# Altium PCB SwitchMultiControl.PcbDoc
Units mm, origin at the board's own origin, x right, y up, seen from the top; angles counter-clockwise.
Board outline 65 x 96 mm, 2 copper layers (Top Layer, Bottom Layer); 37 components, 23 nets, 109 pads, 0 vias.
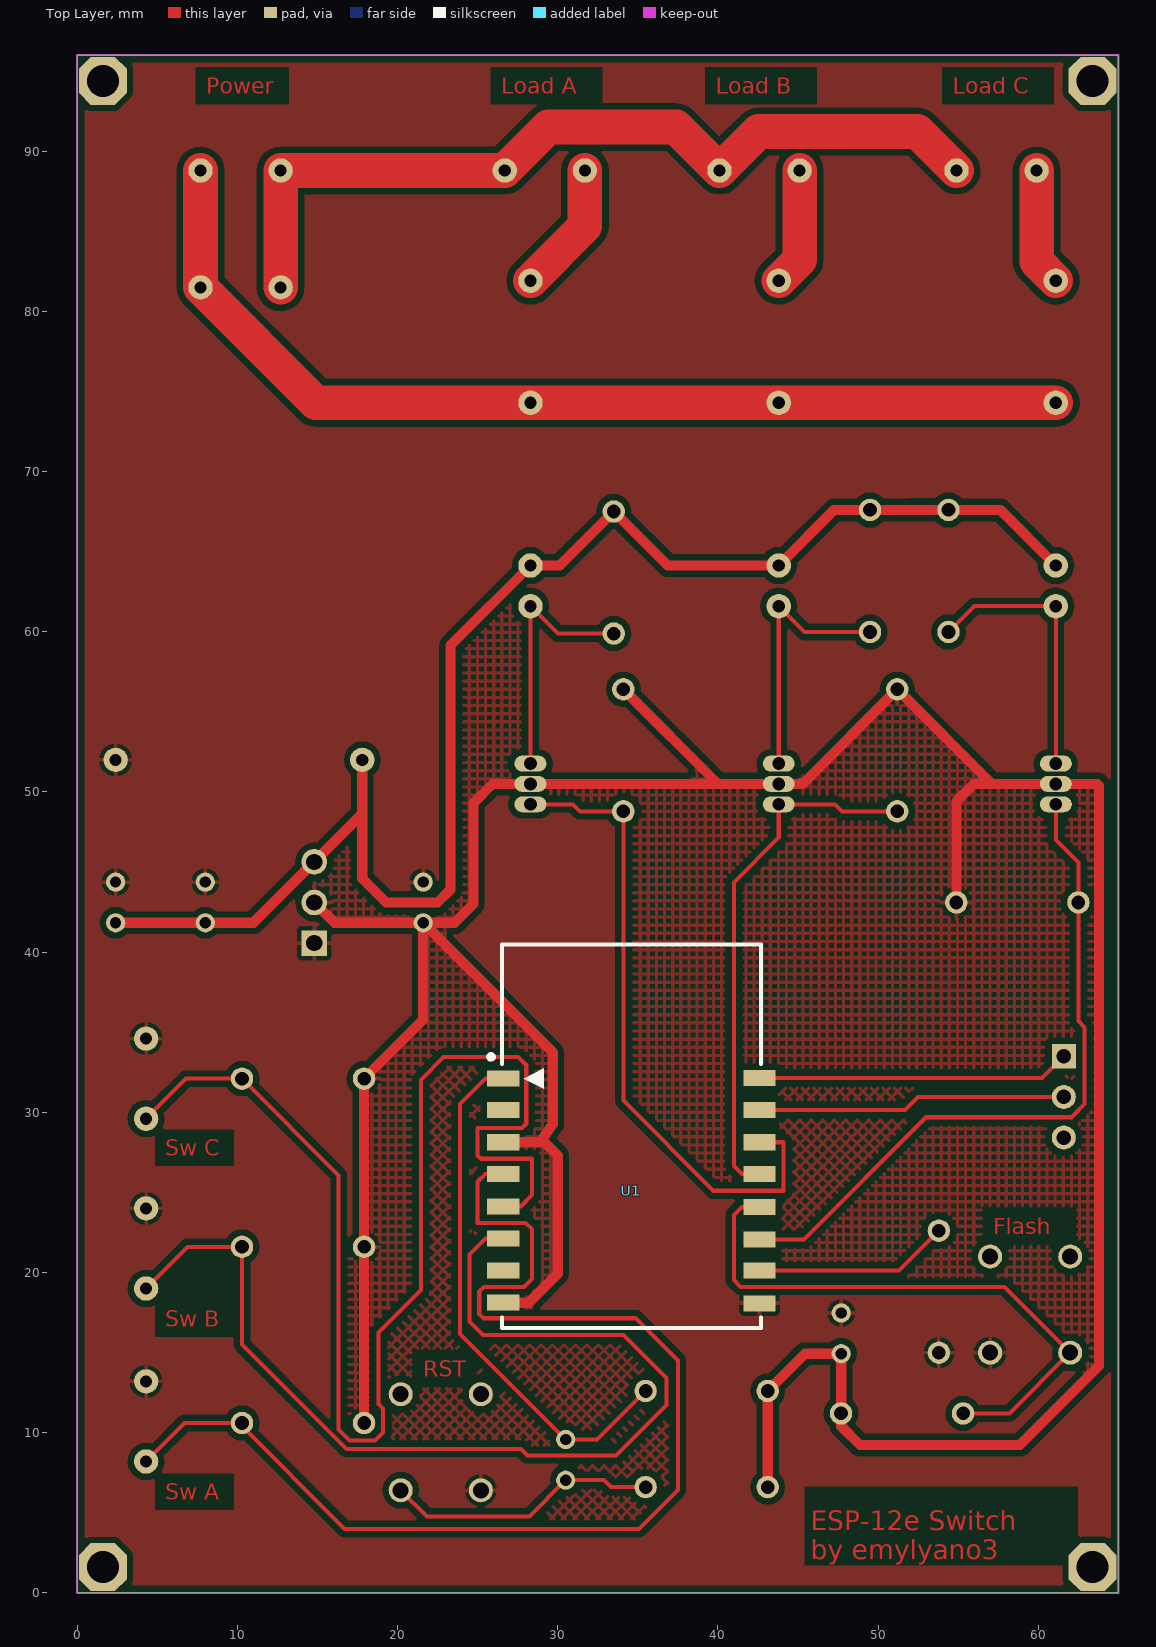
[diagram p0: Top Layer view]
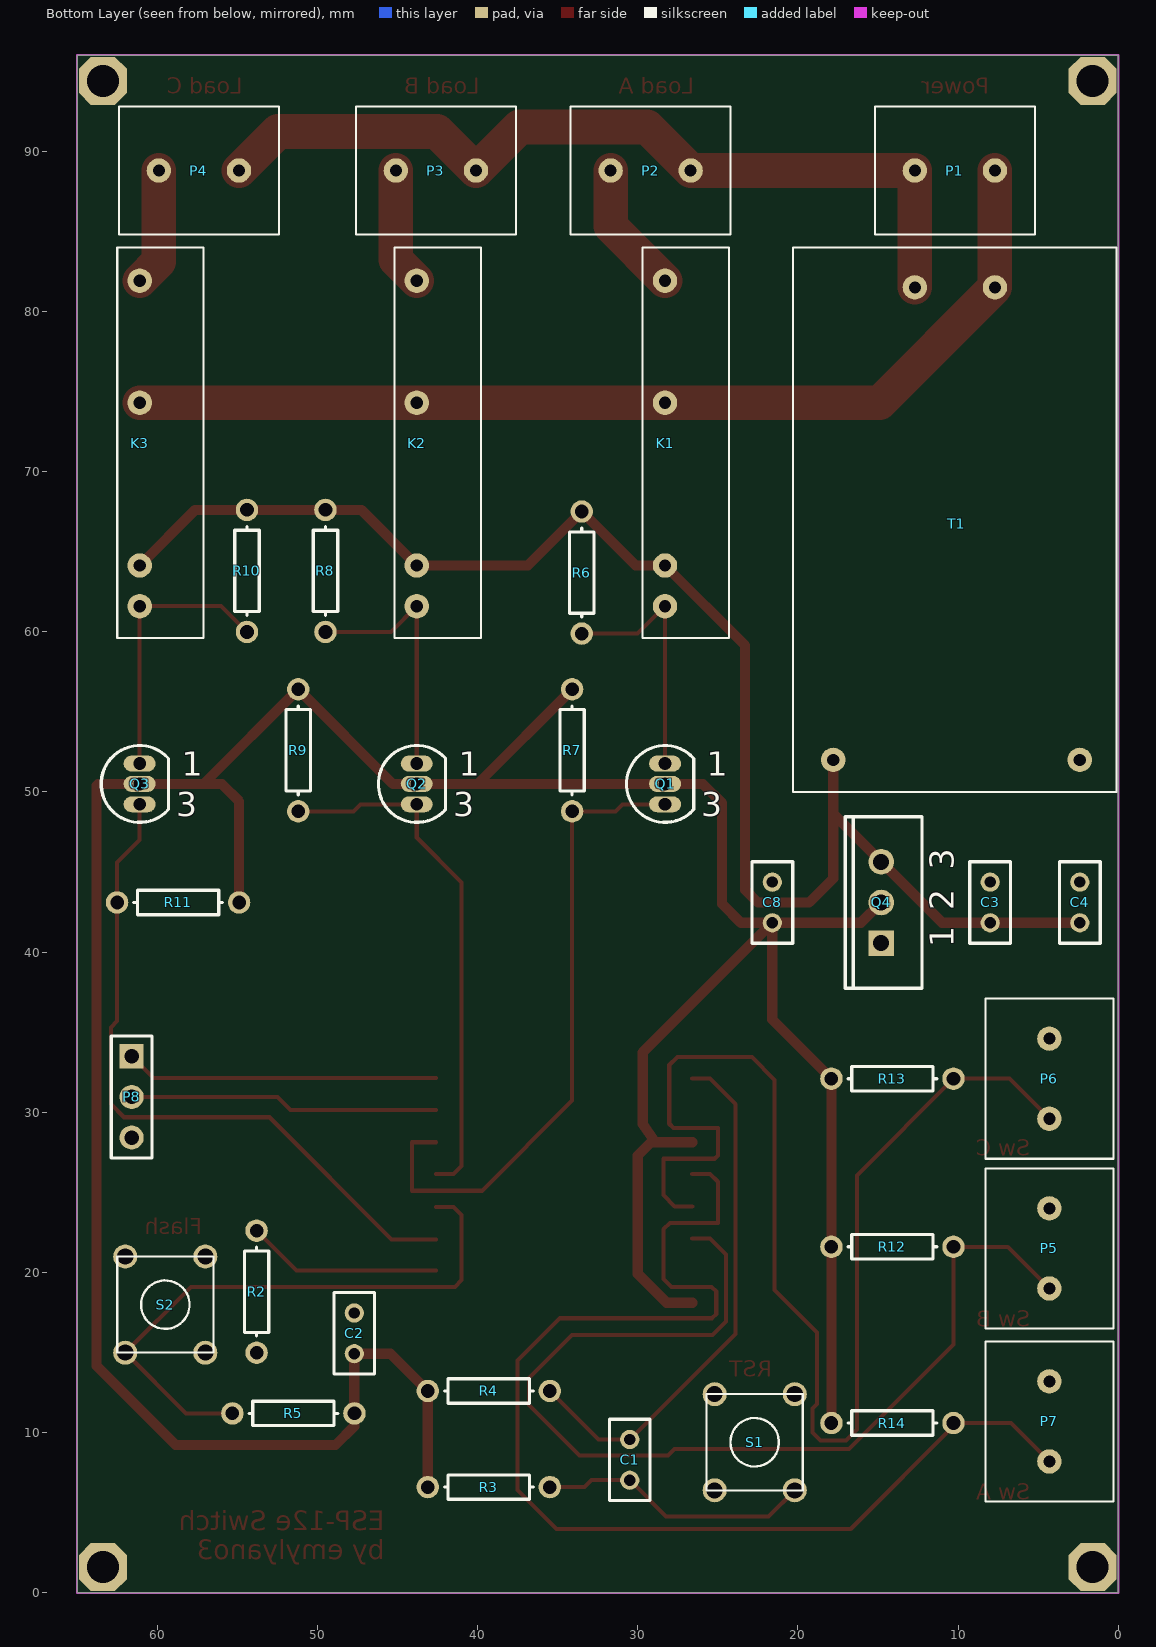
[diagram p1: Bottom Layer view, seen from below]

## Layer stack, top to bottom
Top Solder: solder mask 0.0102, Solder Resist, Dk 3.5
Top Layer: signal copper 0.0356
Dielectric 1: dielectric 0.32, FR-4, Dk 4.8
Bottom Layer: signal copper 0.0356
Bottom Solder: solder mask 0.0102, Solder Resist, Dk 3.5

## Board outline
0,0 0,96 65,96 65,0

## Design rules (kind name [scope] priority, off if disabled: settings)
Clearance "Polygon Clearence" [InPoly] p1: gap=0.4 ignorepadtopadclearanceinfootprint=FALSE
PolygonConnect [All] p1: connectstyle=Relief reliefconductorwidth=0.254 reliefentries=4 polygonreliefangle="90 Angle" airgapwidth=0.254
RoutingLayers [All] p1: top layer_v5=TRUE bottom layer_v5=FALSE
RoutingVias [All] p1: holewidth=0.711 width=1.27 viastyle="Through Hole" minholewidth=0.711 minwidth=1.27 maxholewidth=0.711 maxwidth=1.27
SolderMaskExpansion [All] p1: expansion=0.102
Width "Schematic Width Constraint_7" [InNet('NetK1_1')] p1: maxlimit=2.286 minlimit=1.778 preferedwidth=2.159
Width "Schematic Width Constraint_6" [InNet('NetK3_1')] p2: maxlimit=2.286 minlimit=1.778 preferedwidth=2.159
Width "Schematic Width Constraint_5" [InNet('NetK2_1')] p3: maxlimit=2.286 minlimit=1.778 preferedwidth=2.159
Width "Schematic Width Constraint_4" [InNet('Load GND')] p4: maxlimit=2.286 minlimit=1.778 preferedwidth=2.159
Width "Schematic Width Constraint_3" [InNet('220VAC')] p5: maxlimit=2.286 minlimit=1.778 preferedwidth=2.159
Width "Schematic Width Constraint_2" [InNet('GND')] p6: maxlimit=0.762 minlimit=0.508 preferedwidth=0.635
Width "Schematic Width Constraint_1" [InNet('+5VDC')] p7: maxlimit=0.762 minlimit=0.381 preferedwidth=0.635
Width "Schematic Width Constraint" [InNet('+3.3VDC')] p8: maxlimit=0.762 minlimit=0.381 preferedwidth=0.635
Width [All] p9: maxlimit=0.254 minlimit=0.254 preferedwidth=0.254
29 further rules are at their usual default settings.

## Components (designator, comment, footprint, x,y, rotation, side; value= is the part's Value field where it differs from the comment)
C1 "Cap Pol1" RAD-0.1 30.5,8.3 r270 bottom value=10uf
C2 "Cap" RAD-0.1 47.7,16.2 r90 bottom value=100nF
C3 "Cap Pol1" RAD-0.1 8,43.1 r90 bottom value=100uF
C4 "Cap" RAD-0.1 2.4,43.1 r270 bottom value=100nF
C8 "Cap" RAD-0.1 21.6,43.1 r270 bottom value=100nF
K1 "G3MB-202P DC5" "G3MB-202P DC5" 24.3,59.6 r90 bottom
K2 "G3MB-202P DC5" "G3MB-202P DC5" 39.8,59.6 r90 bottom
K3 "G3MB-202P DC5" "G3MB-202P DC5" 57.1,59.6 r90 bottom
P1 "VAC" ScrewTerminal-X2 15.2,84.8 r180 bottom
P2 "Load 1" ScrewTerminal-X2 34.2,84.8 r180 bottom
P3 "Load 2" ScrewTerminal-X2 47.6,84.8 r180 bottom
P4 "Load 3" ScrewTerminal-X2 62.4,84.8 r180 bottom
P5 "Switch 1" ScrewTerminal-X2 0.3,16.5 r90 bottom
P6 "Switch 2" ScrewTerminal-X2 0.3,27.1 r90 bottom
P7 "Switch 3" ScrewTerminal-X2 0.3,5.7 r90 bottom
P8 "Pin export" HDR1X3 61.6,33.5 r270 bottom
Q1 "2N7000" SOT54 28.3,50.5 r180 bottom
Q2 "2N7000" SOT54 43.8,50.5 r180 bottom
Q3 "2N7000" SOT54 61.1,50.5 r180 bottom
Q4 "Regulador 3.3V" TO-220-AB 14.8,43.1 r90 bottom
R2 "Res1" AXIAL-0.3 53.8,18.8 r270 bottom value=10K
R3 "Res1" AXIAL-0.3 39.3,6.6 r0 bottom value=10K
R4 "Res1" AXIAL-0.3 39.3,12.6 r0 bottom value=10K
R5 "Res1" AXIAL-0.3 51.5,11.2 r180 bottom value=10K
R6 "Res1" AXIAL-0.3 33.5,63.7 r90 bottom value=10K
R7 "Res1" AXIAL-0.3 34.1,52.6 r90 bottom value=10K
R8 "Res1" AXIAL-0.3 49.5,63.8 r90 bottom value=10K
R9 "Res1" AXIAL-0.3 51.2,52.6 r90 bottom value=10K
R10 "Res1" AXIAL-0.3 54.4,63.8 r90 bottom value=10K
R11 "Res1" AXIAL-0.3 58.7,43.1 r180 bottom value=10K
R12 "Res1" AXIAL-0.3 14.1,21.6 r0 bottom value=10K
R13 "Res1" AXIAL-0.3 14.1,32.1 r0 bottom value=10K
R14 "Res1" AXIAL-0.3 14.1,10.6 r0 bottom value=10K
S1 "Reset" PushButton 25.7,6.4 r180 bottom
S2 "Flash" PushButton 56.5,20.99 r0 bottom
T1 "220VAC - 5VDC" HLK-PM 7.7,81.5 r270 bottom
U1 "ESP-12" ESP_12 26.6,32.1 r0 top

## Footprints (in the part's own frame and the unit in brackets; to place one, negate y for a bottom-side part, rotate by r counter-clockwise, add the part's x,y. Pads: shape width x height; smd on the part's side, far side on the other; paste and mask are expansions set on the pad)
AXIAL-0.3 [mm] "Axial Device, Thru-Hole; 2 Leads; 0.3 in Pin Spacing"
  round 1.4 hole 0.85: 1(-3.81,0) 2(3.81,0)
  silkscreen extent -2.77,-0.76 2.77,0.76
ESP_12 [mm]
  rect 2x1 smd: 1(0,0) 2(0,-1.97) 3(0,-3.97) 4(0,-5.94) 5(0,-7.98) 6(0,-9.99) 7(0,-11.98) 8(0,-13.99) 9(16,-14.03) 10(16,-11.99) 11(16,-10.03) 12(16,-8.01) 13(16,-5.95) 14(16,-3.97) 15(16,-1.95) 16(16,0.03)
  silkscreen extent -0.91,-15.57 16.08,8.37
"G3MB-202P DC5" [mil] "RELAY MINI SSR 240VAC@2A ZERO"
  round 60 hole 30: 1(878.74,157.48) 2(578.74,157.48) 3(178.74,157.48) 4(78.74,157.48)
  silkscreen extent 0,0 961,213
HDR1X3 [mm] "Connector; Header; 3 Position"
  rect 1.5x1.5 hole 0.9: 1(0,0)
  round 1.5 hole 0.9: 2(2.54,0) 3(5.08,0)
  silkscreen extent -1.27,-1.27 6.35,1.27
HLK-PM [mil] "Trans 220VAC-5/12/3,3 VDC"
  round 60 hole 30: 1(0,0) 2(0,-196.85) 3(1161.41,208.66) 4(1161.41,-397.64)
  silkscreen extent -98,-496 1240,299
PushButton [mm]
  round 1.5 hole 1: 1(0.5,6) 2(5.5,6) 3(0.5,0) 4(5.5,0)
  silkscreen extent 0,0 6,6
RAD-0.1 [mm] "Radial Cap, Thru-Hole; 2 Leads; 0.1 in Pin Spacing"
  round 1.2 hole 0.7: 1(-1.27,0) 2(1.27,0)
  silkscreen extent -2.54,-1.27 2.54,1.27
ScrewTerminal-X2 [mil]
  round 60 hole 30: 1(98.43,157.49) 2(295.28,157.49)
  silkscreen extent 0,0 394,315
SOT54 [mm] "TO, Flat Index; 3 In-Line, Axial Leads; Body Dia. 4.6mm; Leads 0.48 x 0.45 mm (max)"
  oval 2x1 hole 0.8: 1(0,1.27) 2(0,0) 3(0,-1.27)
  silkscreen extent -2.4,-2.4 1.8,2.4
TO-220-AB [mm] "TO, Thru-Hole, Vertical, Heatsink Mounted; 3 In-Line Leads; Pitch 2.54 mm"
  rect 1.6x1.6 hole 1: 1(-2.54,0)
  round 1.6 hole 1: 2(0,0) 3(2.54,0)
  silkscreen extent -5.35,-2.55 5.35,2.25

## Part data
C1 C3: "Polarized Capacitor (Radial)", LatestRevisionDate=17-Jul-2002, LatestRevisionNote="Re-released for DXP Platform.", PackageDescription="Polarized Capacitor (Radial); 2 Leads", PackageReference=RB7.6-15, Published=8-Jun-2000, Publisher="Altium Limited"
C2 C4 C8: "Capacitor", LatestRevisionDate=17-Jul-2002, LatestRevisionNote="Re-released for DXP Platform.", PackageDescription="Radial Cap, Thru-Hole; 2 Leads; 0.3 in Pin Spacing", PackageReference=RAD-0.3, Published=8-Jun-2000, Publisher="Altium Limited"
K1 K2 K3: "RELAY MINI SSR 240VAC@2A ZERO", Mfr=Omron, Mfr PN="G3MB-202P DC5"
P1 P2 P3 P4 P5 P6 P7: library part ScrewTerminal
P8: library part "Header 3", "Header, 3-Pin", LatestRevisionDate=17-Jul-2002, LatestRevisionNote="Re-released for DXP Platform.", Publisher="Altium Limited"
Q1 Q2 Q3: "N-channel Enhancement Mode Field-effect Transistor", Code_JEDEC=TO-92, Code_JEITA=SC-43, ComponentLink1Description="Manufacturer Link", ComponentLink1URL=http://www.semiconductors.philips.com/, ComponentLink2Description=Datasheet, ComponentLink2URL=http://www.semiconductors.philips.com/acrobat/datasheets/2N7000-03.pdf, DatasheetVersion=19-May-2000, LatestRevisionDate=12-Dec-2006, LatestRevisionNote="Footprint pad sequence fixed.", PackageDescription="Plastic Single-Ended Leaded (through hole) package; 3 Leads (TO-92)", PackageReference=SOT54, PackageVersion=Feb-1997, Published=17-Sep-2003, Publisher="Altium Limited"
Q4: library part AMS1117
R2 R3 R4 R5 R6 R7 R8 R9 R10 R11 R12 R13 R14: "Resistor", LatestRevisionDate=17-Jul-2002, LatestRevisionNote="Re-released for DXP Platform.", PackageDescription="Axial Device, Thru-Hole; 2 Leads; 0.3 in Pin Spacing", PackageReference=AXIAL-0.3, Published=8-Jun-2000, Publisher="Altium Limited"
S1 S2: library part IT-2175, "Tactile Switch, DPST; Thru-Hole; Vertical; Rating DC 12V, 50mA (max)", PackageDocument=Rev.0, ComponentLink1Description="Manufacturer Link", ComponentLink1URL=http://www.ilswitch.com/, ComponentLink2Description="Device Overview", ComponentLink2URL=http://www.ilswitch.com/list.php?ac_id=010112&ai_id=91, DatasheetDocument=Rev.0, PackageReference=IT-2175, Published=6-Jun-2005, Publisher="Altium Limited"
T1: library part HLK-PM, "HLK-PM*", Mfr=HLK-PM01

## Free pads (board coordinates)
  oct 3x3 hole 2: 1(1.6,94.4) 2(63.4,94.4) 3(63.4,1.6) 4(1.6,1.6)

## Nets (pads, with @x,y where several pads share a name; then routed paths per layer and width w, separated by ;. In a path a pad name is that pad's centre, name@x,y a point inside that pad or via, vN(x,y) a via of type N, cw(c..) or ccw(c..) an arc to the next point about the centre after c; other vN are vias at no path point)
220VAC: K1.2 K2.2 K3.2 P1.2 T1.1 | length 63.7
  Top Layer w2.159: P1.2 T1.1 14.9,74.3 K1.2 K2.2 K3.2
+3.3VDC: C2.1 C8.2 Q1.2 Q2.2 Q3.2 Q4.2 R3.2 R4.2 R5.2 R7.2 R9.2 R11.2 R12.2 R13.2 R14.2 U1.3 U1.8 | length 215.4
  Top Layer w0.635: Q4.2 16.07,41.83 C8.2 ; R14.2@17.71,10.6 17.91,10.8 R12.2 R13.2 21.6,35.79 C8.2 ; U1.8 28.188,18.11 30,19.922 30,27.3 29.17,28.13 28.911,28.13 ; U1.3 28.911,28.13 ; R7.2 40.01,50.5 ; R3.2 R4.2 45.44,14.93 C2.1 47.7,10.4 48.872,9.228 58.856,9.228 63.799,14.172 63.799,50.398 63.698,50.5 Q3.2 57.11,50.5 ; R11.2 54.89,49.414 55.976,50.5 57.11,50.5 ; C8.2 29.687,33.743 29.687,29.273 28.911,28.13 ; C8.2 23.561,41.83 24.734,43.003 24.734,49.3 25.934,50.5 Q1.2 40.01,50.5 ; 40.01,50.5 Q2.2 45.29,50.5 R9.2 57.11,50.5
+5VDC: C3.1 C4.2 K1.3 K2.3 K3.3 Q4.3 R6.2 R8.2 R10.2 T1.4 | length 92.9
  Top Layer w0.635: C4.2 C3.1 10.99,41.83 Q4.3 17.8,48.64 ; T1.4 17.8,48.64 ; K3.3 57.63,67.61 R10.2 51.937,67.61 R8.2 47.27,67.61 K2.3 36.87,64.14 R6.2 30.13,64.14 K1.3 23.3,59.14 23.3,43.9 22.5,43.1 19.301,43.1 17.8,44.601 17.8,48.64
GND: C2.2 C3.2 C4.1 C8.1 P5.2 P6.2 P7.2 Q4.1 R2.2 S1.3 S2.1 T1.3 U1.9
"Load GND": P1.1 P2.2 P3.2 P4.2 T1.2 | length 53.8
  Top Layer w2.159: T1.2 P1.1 19.679,88.8 P2.2 29.415,91.515 37.385,91.515 P3.2 42.535,91.235 52.465,91.235 P4.2
NetC1_1: C1.1 R4.1 U1.1 | length 33.3
  Top Layer w0.254: U1.1 25.496,32.1 23.9,30.504 23.9,16.17 C1.1 32.46,9.57 R4.1
NetC1_2: C1.2 R3.1 S1.4 | length 17.1
  Top Layer w0.254: S1.4 21.839,4.761 28.231,4.761 C1.2 32.9,7.03 33.33,6.6 R3.1
NetK1_1: K1.1 P2.1 | length 8.3
  Top Layer w2.159: K1.1 31.7,85.32 P2.1
NetK1_4: K1.4 Q1.1 R6.1 | length 15.7
  Top Layer w0.254: Q1.1 28.3,56.666 K1.4 30.01,59.89 R6.1
NetK2_1: K2.1 P3.1 | length 7.4
  Top Layer w2.159: K2.1 45.1,83.22 P3.1
NetK2_4: K2.4 Q2.1 R8.1 | length 16.2
  Top Layer w0.254: Q2.1 K2.4 45.41,59.99 R8.1
NetK3_1: K3.1 P4.1 | length 7.4
  Top Layer w2.159: P4.1 59.9,83.12 K3.1
NetK3_4: K3.4 Q3.1 R10.1 | length 17.2
  Top Layer w0.254: R10.1 56.01,61.6 K3.4 Q3.1
NetP5_1: P5.1 R12.1 U1.6 | length 66
  Top Layer w0.254: P5.1 6.9,21.6 R12.1 10.29,15.502 16.802,8.99 27.71,8.99 28.116,8.584 33.649,8.584 36.8,11.734 36.8,13.4 34.1,16.1 25.332,16.1 24.5,16.932 24.5,21.114 25.496,22.11 U1.6
NetP6_1: P6.1 R13.1 U1.5 | length 81.7
  Top Layer w0.254: P6.1 6.8,32.1 R13.1 16.327,26.064 16.327,10.184 17.012,9.498 18.598,9.498 19.1,10 19.1,11.5 18.8,11.8 18.8,16.239 21.457,18.896 21.457,32.028 22.88,33.45 27.528,33.45 28.036,32.942 28.036,29.285 27.782,29.031 25,29.031 25,27.3 25.2,27.1 28.4,27.1 28.4,24.827 27.693,24.12 U1.5
NetP7_1: P7.1 R14.1 U1.4 | length 75.7
  Top Layer w0.254: P7.1 6.7,10.6 10.09,10.6 16.704,3.986 35.072,3.986 37.5,6.415 37.5,14.5 34.856,17.144 25.356,17.144 25.1,17.4 25.1,18.8 25.4,19.1 27.9,19.1 28.4,19.6 28.4,22.7 28,23.1 25,23.1 25,25.664 25.496,26.16 U1.4
NetP8_1: P8.1 U1.16 | length 19.6
  Top Layer w0.254: U1.16 60.23,32.13 P8.1
NetP8_2: P8.2 U1.15 | length 19.3
  Top Layer w0.254: U1.15 51.683,30.15 52.493,30.96 P8.2
NetQ1_3: Q1.3 R7.1 U1.14 | length 40.9
  Top Layer w0.254: Q1.3 30.957,49.23 31.397,48.79 R7.1 34.1,30.739 39.739,25.1 44.1,25.1 44.1,28.13 U1.14
NetQ2_3: Q2.3 R9.1 U1.13 | length 33.1
  Top Layer w0.254: U1.13 41.498,26.15 41,26.648 41,44.345 43.8,47.145 Q2.3 47.315,49.23 47.755,48.79 R9.1
NetQ3_3: Q3.3 R11.1 U1.11 | length 43.3
  Top Layer w0.254: U1.11 45.383,22.07 53.004,29.691 62.072,29.691 62.9,30.519 62.9,35.3 62.51,35.69 R11.1 62.51,45.59 61.1,47 Q3.3
NetR2_1: R2.1 U1.10 | length 12.2
  Top Layer w0.254: U1.10 51.3,20.11 R2.1
NetR5_1: R5.1 S2.2 U1.12 | length 37
  Top Layer w0.254: U1.12 41.498,24.09 41,23.592 41,19.521 41.421,19.1 57.89,19.1 S2.2 58.21,11.2 R5.1
pads on no net: P8.3 S1.1 S1.2 S2.3 S2.4 U1.2 U1.7

## Polygon pours and split planes (outlines as drawn)
no net on Top Layer "Dead Poly" (hatched 45Degree grid 0.508 track 0.203, pour order 12): 13.7,37.7 61.996,37.7 63.9,35.796 63.9,8.2 42.1,8.2 42.1,4.8 39.3,2 39.2,2.1 13.4,2.1
+3.3VDC on Top Layer "3.3 Poly" (hatched 90Degree grid 0.508 track 0.203, remove dead copper, pour order 10): 6.8,68.7 63.9,68.7 63.9,4.9 64.4,4.4 63.6,3.6 6.8,3.6
GND on Top Layer "GND Poly" (solid, remove dead copper, pour order 8): 65,96 0,96 0,0 65,0

## Keep-outs
Keep-Out Layer:
  the board outline again, w0.127

## Other copper
Top Layer:
  text "Power" at 8.051,93.6 h1
  text "Load A" at 26.468,93.6 h1
  text "Load B" at 39.868,93.6 h1
  text "Load C" at 54.668,93.6 h1
  text "Sw C" at 5.5,27.3 h1
  text "Flash" at 57.2,22.4 h1
  text "Sw B" at 5.5,16.6 h1
  text "RST" at 21.6,13.5 h1
  text "Sw A" at 5.5,5.8 h1
  text "ESP-12e Switch / by emylyano3" at 45.8,2.1 h1.2

## Text inside footprints (layer, text, board x,y; h text height)
Q1: Bottom Overlay "3" at 26.025,48.48 h1.5; Bottom Overlay "1" at 25.684,51.02 h1.5
Q2: Bottom Overlay "3" at 41.525,48.48 h1.5; Bottom Overlay "1" at 41.184,51.02 h1.5
Q3: Bottom Overlay "3" at 58.825,48.48 h1.5; Bottom Overlay "1" at 58.484,51.02 h1.5
Q4: Bottom Overlay "3" at 10.275,45.14 h1.5 r270; Bottom Overlay "2" at 10.275,42.6 h1.5 r270; Bottom Overlay "1" at 10.275,40.31 h1.5 r270
U1: Mechanical 13 "CUTOUT POLYGON" at 26.727,39.466 h0.25; Mechanical 13 "ANTENNA AREA" at 26.727,39.974 h0.25